# EAGLE board what-the-frequency-mk-3 (EAGLE 6.4)
What's the Frequency, Arduino? What's the Frequency, Arduino? Frequency counter with LCD display, banana jack, and DC barrel jack with a 5V regulator built-in (as opposed to the one on SparkFun which lacks the more robust internal connections, but is cheaper. Designed to fit in a Hammond 1591XXABK/1591XXAGY enclosure, though you'll need to cut holes for the various external bits.
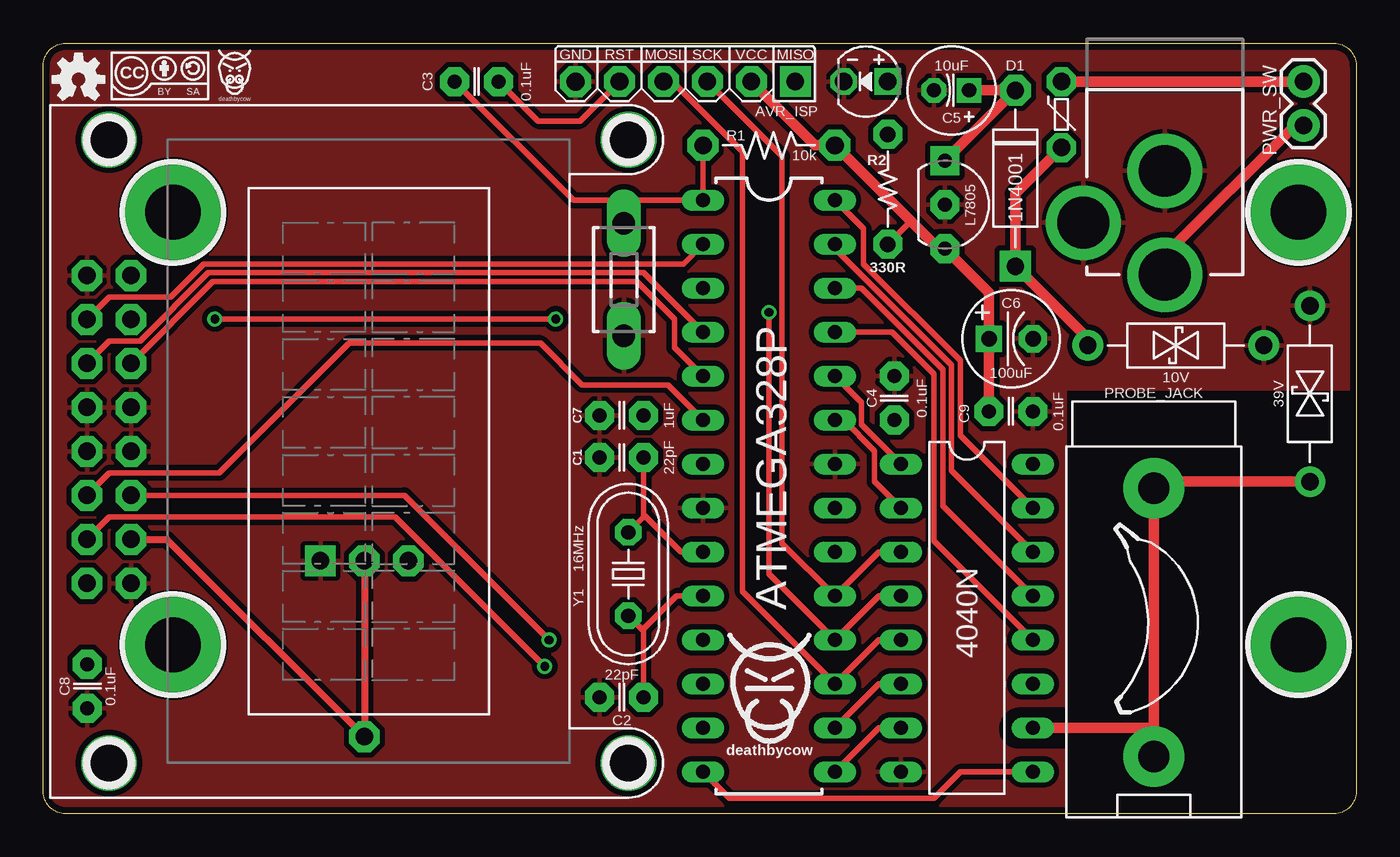
[diagram p0: board, top side]
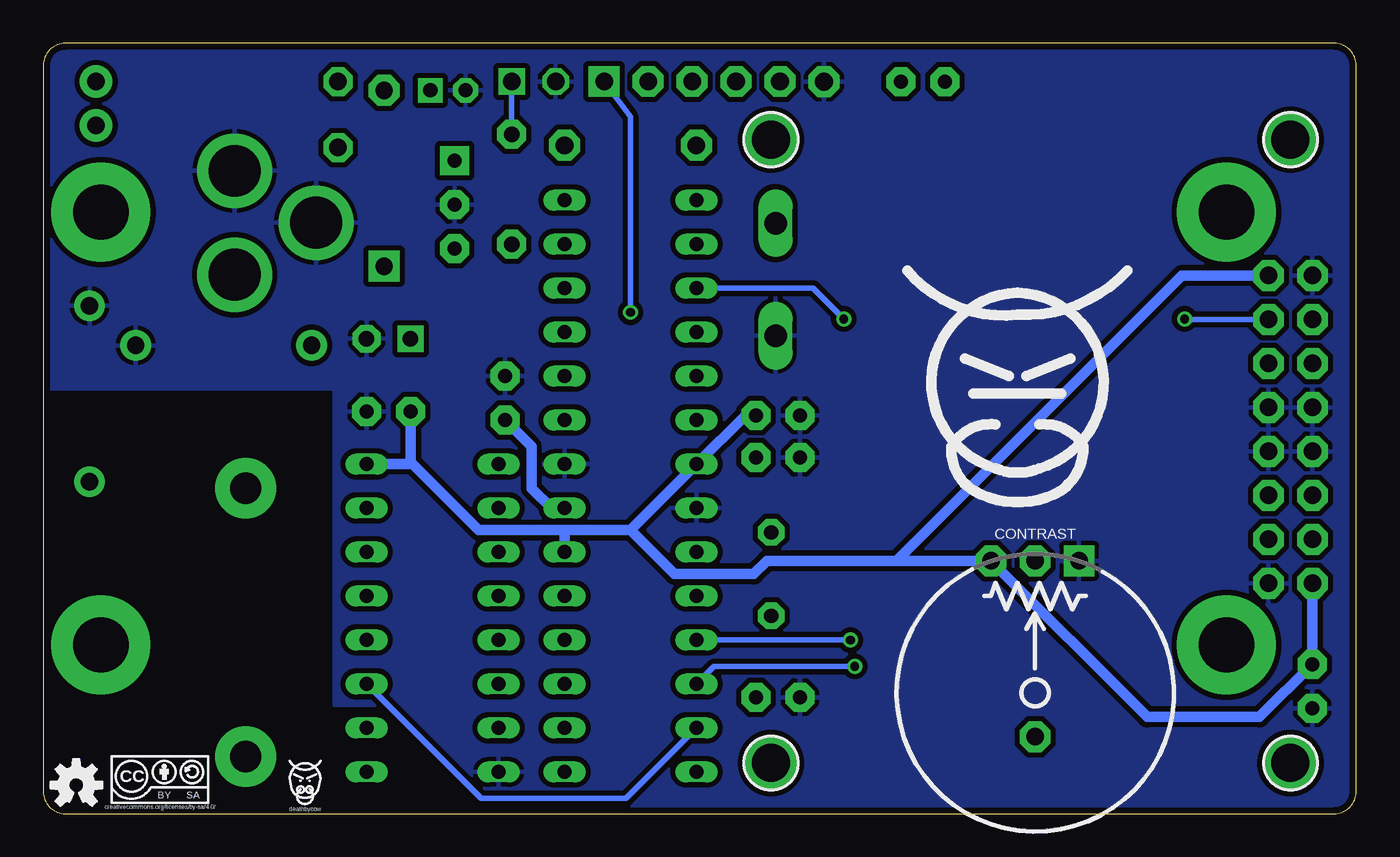
[diagram p1: board, bottom side, seen from below]

Size 75.82 x 44.5 mm. Coordinates in mm from the lower left corner, seen from the top.
Outline: 1.27,44.5 74.55,44.5 arc-90 75.82,43.23 75.82,1.27 arc-90 74.55,0 1.27,0 arc-90 0,1.27 0,43.23 arc-90 1.27,44.5
Copper layers (1*16): Top 0.0356mm / dielectric 1.5011mm / Bottom 0.0356mm
Design rules "LaenPCBOrder2": minimum track width 6mil, minimum drill 13mil, track to track 6mil, track to pad 6mil, pad to pad 6mil, via to via 6mil, smd to smd 6mil, copper to edge 15mil, drill to drill 6mil, minimum pad ring 7mil, minimum via ring 7mil, stop-mask expansion 3mil, vias tented up to drill 20mil, thermal gap 10mil

## Footprints (pad centres in the part's own frame; a part is rotated, then mirrored left to right if it is on the bottom)
C025-024X044 = drill 0.813 pad 1.676 octagon: 1 -1.27,0; 2 1.27,0
E2-5 = drill 0.813 pad 1.422 square: + -1.016,0 | drill 0.813 pad 1.422 octagon: - 1.016,0
E2,5-6 = drill 0.9 pad 1.524 square: + -1.27,0 | drill 0.9 pad 1.6 octagon: - 1.27,0
POT-THUMBWHEEL = drill 1.016 pad 1.778 square: 1 -2.54,0 | drill 1.016 pad 1.778 octagon: 2 0,0; 2@1 0,10.16; 3 2.54,0
DO-41 = drill 1 pad 1.778 square: A -5.08,0 | drill 1 pad 1.778 octagon: C 5.08,0
PTC = drill 1.016 pad 1.676 octagon: P$1 -1.905,0; P$2 1.905,0
HOLE-#4 = drill 3.2 pad 5.715: P$1 0,0
DIL16 = drill 0.813 long: 1 -8.89,-3.81; 2 -6.35,-3.81; 3 -3.81,-3.81; 4 -1.27,-3.81; 5 1.27,-3.81; 6 3.81,-3.81; 7 6.35,-3.81; 8 8.89,-3.81; 9 8.89,3.81; 10 6.35,3.81; 11 3.81,3.81; 12 1.27,3.81; 13 -1.27,3.81; 14 -3.81,3.81; 15 -6.35,3.81; 16 -8.89,3.81
POWER_JACK_PTH = drill 2.997 pad 4.318: GND 0,7.7; GNDBREAK 4.7,10.7; PWR 0,13.7
AVR_MINI_PROG = drill 1.016 pad 1.778 square: 1 0,0 | drill 1.016 pad 1.778 octagon: 2 2.54,0; 3 5.08,0; 4 7.62,0; 5 10.16,0; 6 12.7,0.01
LED3MM = drill 1 pad 1.524 square: A -1.27,0 | drill 1 pad 1.524 octagon: K 1.27,0
BANANA-PTH-RA-SAFEWORD = drill 1.8 pad 3.5: P$1 0,0; P$2 15.5,0
1X02 = drill 1.016 pad 1.88: 1 0,0; 2 2.54,0
RESISTOR-AXIAL-PTH-7.68MM = drill 1.016 pad 1.778 octagon: P$1 -3.81,0; P$2 3.81,0
RESISTOR-AXIAL-PTH-5.08MM = drill 0.9 pad 1.676 octagon: P$1 -3.175,0; P$2 3.175,0
DTS-3 = drill 1.3 long: 1 -3.25,0; 2 3.25,0
DO-41-TVS = drill 1 pad 1.778: P$1 -5.08,0; P$2 5.08,0
DIL28-3 = drill 0.813 long: 1 -16.51,-3.81; 2 -13.97,-3.81; 3 -11.43,-3.81; 4 -8.89,-3.81; 5 -6.35,-3.81; 6 -3.81,-3.81; 7 -1.27,-3.81; 8 1.27,-3.81; 9 3.81,-3.81; 10 6.35,-3.81; 11 8.89,-3.81; 12 11.43,-3.81; 13 13.97,-3.81; 14 16.51,-3.81; 15 16.51,3.81; 16 13.97,3.81; 17 11.43,3.81; 18 8.89,3.81; 19 6.35,3.81; 20 3.81,3.81; 21 1.27,3.81; 22 -1.27,3.81; 23 -3.81,3.81; 24 -6.35,3.81; 25 -8.89,3.81; 26 -11.43,3.81; 27 -13.97,3.81; 28 -16.51,3.81
LCD-8X2 = drill 1 pad 1.778 octagon: 1 -7.62,13.73; 2 -7.62,16.27; 3 -5.08,13.73; 4 -5.08,16.27; 5 -2.54,13.73; 6 -2.54,16.27; 7 0,13.73; 8 0,16.27; 9 2.54,13.73; 10 2.54,16.27; 11 5.08,13.73; 12 5.08,16.27; 13 7.62,13.73; 14 7.62,16.27; 15 10.16,13.73; 16 10.16,16.27 | drill 2.2 pad 3: P$1 -18,-15; P$2 -18,15; P$3 18,15; P$4 18,-15
TO-92-AMMO = drill 0.813 pad 1.676 square: 1 -2.54,0 | drill 0.813 pad 1.676 octagon: 2 0,0; 3 2.54,0
HC49U-V = drill 0.813 pad 1.524 octagon: 1 -2.413,0; 2 2.413,0

## Placement (x,y rotation side)
C1  22pF  [C025-024X044]  33.4,20.57 180 top
C2  22pF  [C025-024X044]  33.4,6.73 180 top
C3  0.1uF  [C025-024X044]  25.02,42.29 180 top
C4  0.1uF  [C025-024X044]  49.15,24 270 top
C5  10uF  [E2-5]  52.45,41.78 180 top
C6  100uF  [E2,5-6]  55.88,27.43 0 top
C7  1uF  [C025-024X044]  33.4,23.01 0 top
C8  0.1uF  [C025-024X044]  2.54,7.37 90 top
C9  0.1uF  [C025-024X044]  55.88,23.24 180 top
CONTRAST  [POT-THUMBWHEEL]  18.54,14.61 180 bottom
D1  1N4001  [DO-41]  56.13,36.7 90 top
F1  PTCPTH  [PTC]  58.8,40.39 90 top
H1  HOLE#4  [HOLE-#4]  7.49,9.75 0 top
H2  HOLE#4  [HOLE-#4]  7.49,34.75 0 top
H3  HOLE#4  [HOLE-#4]  72.49,9.75 0 top
H4  HOLE#4  [HOLE-#4]  72.49,34.75 0 top
IC1  4040N  [DIL16]  53.34,11.3 270 top
J1  POWER_JACKPTH  [POWER_JACK_PTH]  64.77,44.83 180 top
J2  AVR_ISP  [AVR_MINI_PROG]  43.43,42.29 180 top
LED1  LED3MM  [LED3MM]  47.5,42.29 180 top
PROBE_JACK  [BANANA-PTH-RA-SAFEWORD]  64.14,3.3 90 top
PWR_SW  M02PTH  [1X02]  72.77,39.75 90 top
R1  10k  [RESISTOR-AXIAL-PTH-7.68MM]  41.91,38.61 0 top
R2  330R  [RESISTOR-AXIAL-PTH-5.08MM]  48.77,36.07 270 top
S1  DTS-3  [DTS-3]  33.53,30.86 90 top
TVS  10V  [DO-41-TVS]  65.41,27.05 180 top
TVS1  39V  [DO-41-TVS]  73.15,24.26 270 top
U1  ATMEGA328P  [DIL28-3]  41.91,18.92 270 top
U2  LCD-16X28X2  [LCD-8X2]  18.8,20.93 90 top
U$1  [COW_SMALL]  41.94,7.75 0 top
U$2  [OSHW-LOGO-S]  2.03,42.42 0 top
U$3  CC-BY-SA-4.0URL-BOTTOM  [CC-BY-SA-4.0-URL-BOTTOM]  70.74,2.16 0 bottom
U$4  [OSHW-LOGO-S]  73.91,1.65 0 bottom
U$5  [COW_SMALLER]  11.05,42.8 0 top
U$6  [COW_SMALLER]  60.71,1.78 0 bottom
U$7  CC-BY-SA-4.0NO-URL  [CC-BY-SA-4.0-NO-URL]  5.08,42.8 0 top
U$8  [COW]  19.56,23.75 0 bottom
VREG1  L7805  [TO-92-AMMO]  52.07,35.18 270 top
Y1  16MHz  [HC49U-V]  33.78,13.84 90 top

## Library data of the parts
C1-C9 CONTRAST D1 F1 H1-H4 IC1 J2 LED1 PROBE_JACK PWR_SW R1 R2 TVS TVS1 U2 U$1 U$3 U$5-U$8 VREG1 = A_butts
J1 = SparkFun-Connectors; PROD_ID: PRT-00119
S1 = switch-tact
U1 = SparkFun-DigitalIC
U$2 U$4 = SparkFun-Aesthetics
Y1 = SparkFun-FreqCtrl

## Nets
CNT1: IC1.9 U1.14
CNT2: IC1.7 U1.15
CNT3: IC1.6 U1.16
CNT4: IC1.5 J2.4 U1.17
CNT5: IC1.3 J2.3 U1.19
CNT6: IC1.2 U1.23
CNT7: IC1.4 J2.1 U1.18
CNT8: IC1.13 U1.26
CNT9: IC1.12 U1.25
CNT10: IC1.14 U1.27
CNT11: IC1.15 U1.28
CNT12: IC1.1 U1.24
CNT_RST: IC1.11 U1.13
DB4: U1.5 U2.11
DB5: U1.4 U2.12
DB6: U1.3 U2.13
DB7: U1.2 U2.14
E: U1.6 U2.6
GND: C1.2 C2.2 C4.1 C5.- C6.- C7.1 C8.1 C9.1 CONTRAST.1 IC1.8 J1.GND J1.GNDBREAK J2.6 LED1.K S1.1 TVS1.P$1 TVS.P$1 U1.8 U1.22 U2.1 U2.7 U2.8 U2.9 U2.10 U2.16 VREG1.2
N$1: C5.+ D1.C VREG1.1
N$2: LED1.A R2.P$1
N$3: J1.PWR PWR_SW.1
N$4: D1.A F1.P$1 TVS.P$2
N$5: F1.P$2 PWR_SW.2
N$6: C1.1 U1.9 Y1.2
N$7: C2.1 U1.10 Y1.1
N$8: C4.2 U1.21
N$9: CONTRAST.2 CONTRAST.2@1 U2.3
N$11: C3.2 R1.P$1 S1.2 U1.1
PROBE: IC1.10 PROBE_JACK.P$1 PROBE_JACK.P$2 TVS1.P$2
RS: U1.12 U2.4
RST: C3.1 J2.5
RW: U1.11 U2.5
VCC: C6.+ C7.2 C8.2 C9.2 CONTRAST.3 IC1.16 J2.2 R1.P$2 R2.P$2 U1.7 U1.20 U2.2 U2.15 VREG1.3

## Tracks (layer width: path | path; a pad name or v marks a point on that pad's centre or on a via)
CNT1
  Top 0.305: IC1.9 52.96,2.41 51.44,0.89 39.62,0.89 U1.14
CNT2
  Top 0.305: U1.15 48.26,4.95 IC1.7
CNT3
  Top 0.305: U1.16 48.26,7.49 IC1.6
CNT4
  Top 0.305: IC1.5 48.26,10.03 U1.17 40.39,12.83 40.39,38.23 36.32,42.29 J2.4
CNT5
  Top 0.305: IC1.3 48.26,15.11 U1.19 42.67,15.62 42.67,37.97 J2.3
CNT6
  Top 0.305: U1.23 46.23,22.73 48.01,20.95 48.01,19.18 IC1.2
CNT7  (via drill 0.5)
  Top 0.305: IC1.4 48.26,12.57 U1.18 41.91,13.84 v41.91,28.96
  Bottom 0.305: J2.1 41.91,40.26 v41.91,28.96
CNT8
  Top 0.305: IC1.13 51.94,17.78 51.94,25.65 47.24,30.35 U1.26
CNT9
  Top 0.305: IC1.12 51.44,15.75 51.44,25.4 49.02,27.81 U1.25
CNT10
  Top 0.305: IC1.14 52.45,19.81 52.45,25.91 45.72,32.64 U1.27
CNT11
  Top 0.305: IC1.15 52.96,21.84 52.96,26.16 47.37,31.75 47.37,33.78 U1.28
CNT12
  Top 0.305: IC1.1 47.24,22.48 47.24,23.75 U1.24
CNT_RST
  Bottom 0.305: IC1.11 50.55,0.89 42.16,0.89 U1.13
DB4
  Top 0.305: U1.5 36.45,26.92 36.45,28.57 34.29,30.73 9.79,30.73 U2.11
DB5
  Top 0.305: U1.4 34.67,31.24 9.53,31.24 5.59,27.3 3.81,27.3 2.53,26.02 U2.12
DB6  (via drill 0.5)
  Top 0.305: v29.59,28.57 v9.91,28.57
  Bottom 0.305: U1.3 31.37,30.35 v29.59,28.57 | U2.13 9.88,28.55 v9.91,28.57
DB7
  Top 0.305: U1.2 36.96,31.75 9.27,31.75 7.37,29.84 3.81,29.84 U2.14
E
  Top 0.305: U1.6 36.07,24.77 31.11,24.77 28.7,27.18 17.65,27.18 10.16,19.68 3.81,19.68 U2.6
GND
  pour Top (isolate 0.305): 0,44.5 0,0 59.05,0 59.05,3.68 56.39,3.68 arc-90 55.12,4.83 arc-90 56.39,6.22 59.05,6.22 59.05,24.51 75.83,24.51 75.83,44.5
  pour Bottom (isolate 0.305): 0,0 0,44.5 75.82,44.5 75.82,24.51 59.05,24.51 59.05,6.22 55.12,6.22 55.12,3.68 59.05,3.68 59.05,0
N$1
  Top 0.61: VREG1.1 D1.C C5.+
N$2
  Bottom 0.305: LED1.A R2.P$1
N$3
  Top 0.61: PWR_SW.1 72.26,39.75 64.77,32.26 J1.PWR
N$4
  Top 0.61: TVS.P$2 60.33,27.43 D1.A 56.13,35.81 F1.P$1
N$5
  Top 0.61: F1.P$2 PWR_SW.2
N$6
  Top 0.305: U1.9 36.83,15.11 34.67,17.27 | C1.1 34.67,17.27 | 34.67,17.27 34.67,17.14 Y1.2
N$7
  Top 0.305: C2.1 34.67,10.54 34.61,10.6 | 34.61,10.6 Y1.1 | U1.10 36.58,12.57 34.61,10.6
N$8
  Bottom 0.61: U1.21 46.48,17.65 47.62,18.8 47.62,21.21 C4.2
N$9
  Top 0.406: CONTRAST.2 CONTRAST.2@1 7.14,15.85 U2.3
N$11
  Top 0.305: R1.P$1 U1.1 33.53,35.43 | C3.2 30.61,35.43 33.53,35.43 | S1.2 33.53,35.43
PROBE
  Top 0.61: 64.14,4.95 PROBE_JACK.P$2 64.51,19.18 TVS1.P$2 | 64.14,4.95 PROBE_JACK.P$1 | IC1.10 64.14,4.95
RS  (via drill 0.5)
  Top 0.305: v28.96,8.51 20.32,17.14 3.81,17.14 2.53,15.86 U2.4
  Bottom 0.305: U1.12 37.08,8.51 v28.96,8.51
RST
  Top 0.305: C3.1 28.57,40.01 30.99,40.01 J2.5
RW  (via drill 0.5)
  Top 0.305: U2.5 20.85,18.39 v29.21,10.03
  Bottom 0.305: v29.21,10.03 U1.11
VCC
  Top 0.305: R2.P$2 49.91,34.04 49.91,34.42
  Top 0.61: C9.2 C6.+ 54.61,30.1 VREG1.3 51.69,32.64 49.91,34.42 R1.P$2 44.58,38.61 J2.2
  Bottom 0.61: 45.72,16.38 50.67,16.38 54.48,20.19 54.61,20.19 | 45.72,16.38 41.91,16.38 | 41.91,16.38 U1.7 35.28,23.01 C7.2 | U1.20 45.72,16.38 | 26.54,14.61 CONTRAST.3 12.06,5.59 5.59,5.59 C8.2 2.54,13.3 U2.2 | 26.54,14.61 34.04,14.61 34.8,13.84 39.37,13.84 41.91,16.38 | U2.15 10.06,31.09 26.54,14.61 | 54.61,20.19 IC1.16 | C9.2 54.61,20.19